# Altium PCB PCB1.PcbDoc (part 2 of 3)
Units mil, origin at the board's own origin, x right, y up, seen from the top; angles counter-clockwise.
Board outline 1614.17 x 4106.3 mil, 2 copper layers (Top Layer, Bottom Layer), stack 61.8 mil thick; 17 components, 26 nets, 94 pads, 42 vias.
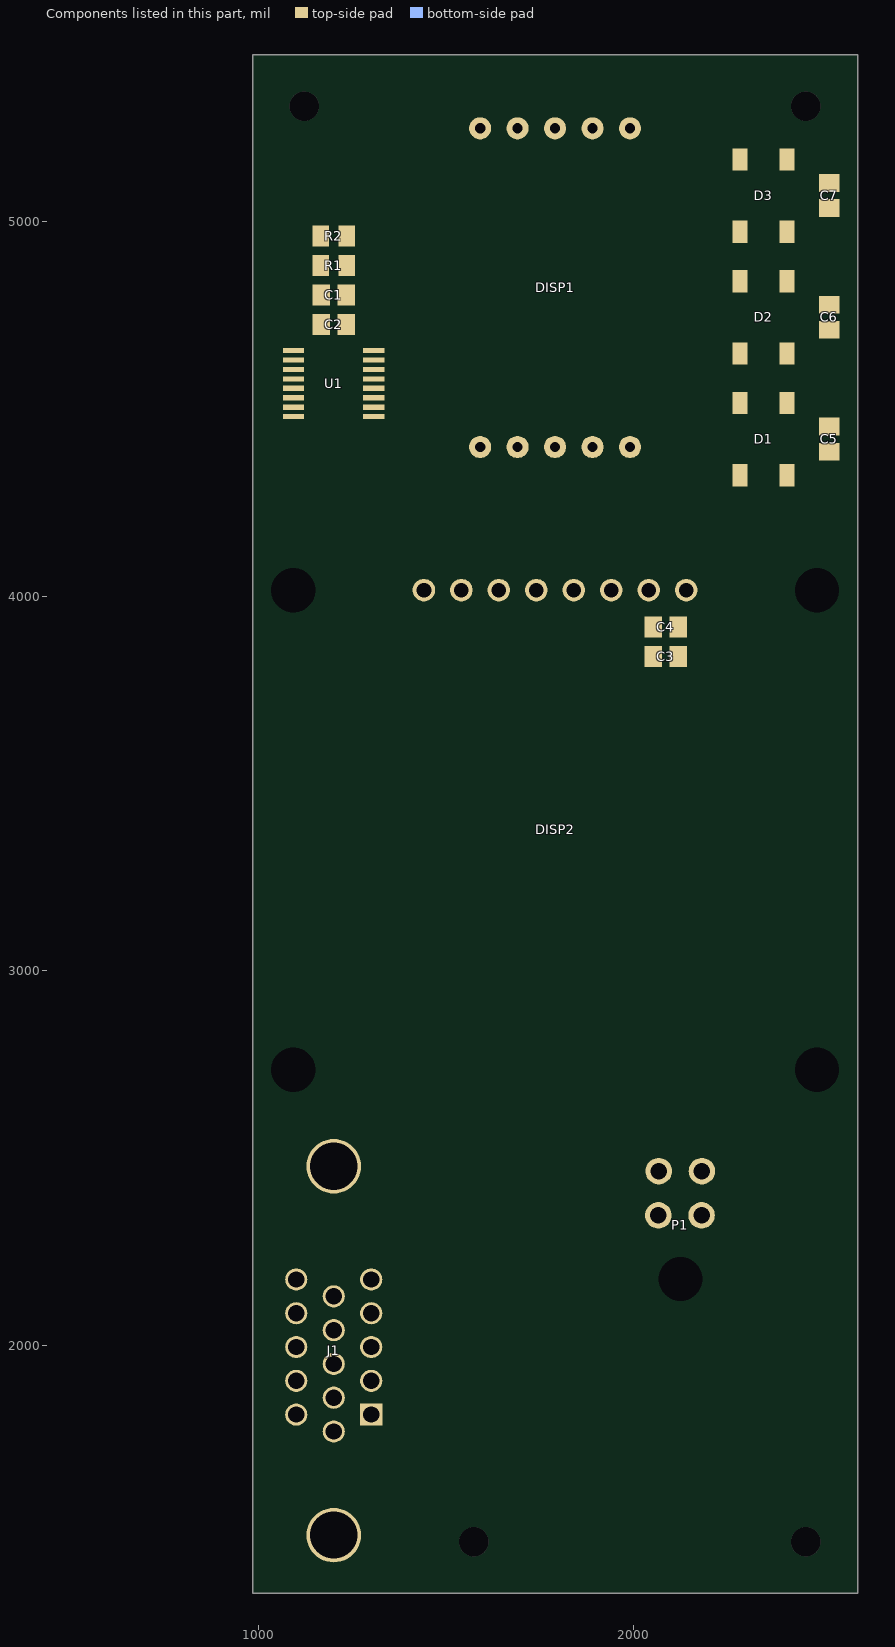
[diagram p2: the components of this part, seen from the top]

## Via types
v1: diameter 35.43/35.43 (per signal layer), hole 11.81, Top Layer to Bottom Layer, tented both sides, 42 vias

## Nets (pads, with @x,y where several pads share a name; then routed paths per layer and width w, separated by ;. In a path a pad name is that pad's centre, name@x,y a point inside that pad or via, vN(x,y) a via of type N, cw(c..) or ccw(c..) an arc to the next point about the centre after c; other vN are vias at no path point) (continued)
copper on no net: (continued)
  Bottom Layer w1: 1741.4,1568 2362.4,1568 ; 1741.4,1569 2362.4,1569 ; 1741.4,1570 2362.4,1570 ; 1741.4,1571 2362.4,1571 ; 1741.4,1572 2362.4,1572 ; 1741.4,1573 2362.4,1573 ; 1741.4,1574 2362.4,1574 ; 1741.4,1575 2362.4,1575 ; 1741.4,1576 2362.4,1576 ; 1741.4,1577 2362.4,1577 ; 1741.4,1578 2362.4,1578 ; 1741.4,1579 2362.4,1579 ; 1741.4,1580 2362.4,1580 ; 1741.4,1581 2362.4,1581 ; 1741.4,1582 2362.4,1582 ; 1741.4,1583 2362.4,1583 ; 1741.4,1584 2362.4,1584 ; 1741.4,1585 2362.4,1585 ; 1741.4,1586 2362.4,1586 ; 1741.4,1587 2362.4,1587 ; 1741.4,1588 2362.4,1588 ; 1741.4,1589 2362.4,1589 ; 1741.4,1590 2362.4,1590 ; 1741.4,1591 2362.4,1591 ; 1741.4,1592 2362.4,1592 ; 1741.4,1593 2362.4,1593 ; 1741.4,1594 2362.4,1594 ; 1741.4,1595 2362.4,1595 ; 1741.4,1596 2362.4,1596 ; 1741.4,1597 2362.4,1597 ; 1741.4,1598 2362.4,1598 ; 1741.4,1599 2362.4,1599 ; 1741.4,1600 2362.4,1600 ; 1741.4,1601 2362.4,1601 ; 1741.4,1602 2362.4,1602 ; 1741.4,1603 2362.4,1603 ; 1741.4,1604 2362.4,1604 ; 1741.4,1605 2362.4,1605 ; 1741.4,1606 1853.4,1606 ; 1741.4,1607 1852.4,1607 ; 1741.4,1608 1851.4,1608 ; 1741.4,1609 1851.4,1609 ; 1741.4,1610 1850.4,1610 ; 1741.4,1611 1850.4,1611 ; 1741.4,1612 1850.4,1612 ; 1741.4,1613 1850.4,1613 ; 1741.4,1614 1850.4,1614 ; 1741.4,1615 1850.4,1615 ; 1741.4,1616 1850.4,1616 ; 1741.4,1617 1851.4,1617 ; 1741.4,1618 1851.4,1618 ; 1741.4,1619 1852.4,1619 ; 1741.4,1620 1852.4,1620 ; 1741.4,1621 1853.4,1621 ; 1741.4,1622 1854.4,1622 ; 1741.4,1623 1864.4,1623 ; 1741.4,1624 1862.4,1624 ; 1741.4,1625 1861.4,1625 ; 1741.4,1626 1860.4,1626 ; 1741.4,1627 1859.4,1627 ; 1741.4,1628 1858.4,1628 ; 1741.4,1629 1857.4,1629 ; 1741.4,1630 1857.4,1630 ; 1741.4,1631 1856.4,1631 ; 1741.4,1632 1856.4,1632 ; 1741.4,1633 1855.4,1633 ; 1741.4,1634 1855.4,1634 ; 1741.4,1635 1855.4,1635 ; 1741.4,1636 1855.4,1636 ; 1741.4,1637 1855.4,1637 ; 1741.4,1638 1855.4,1638 ; 1741.4,1639 1855.4,1639 ; 1741.4,1640 1856.4,1640 ; 1741.4,1641 1856.4,1641 ; 1741.4,1642 1856.4,1642 ; 1741.4,1643 1856.4,1643 ; 1741.4,1644 1857.4,1644 ; 1741.4,1645 1858.4,1645 ; 1741.4,1646 1859.4,1646 ; 1741.4,1647 1862.4,1647 ; 1741.4,1648 1881.4,1648 ; 1741.4,1649 1895.4,1649 ; 1741.4,1650 1896.4,1650 ; 1741.4,1651 1896.4,1651 ; 1741.4,1652 1896.4,1652 ; 1741.4,1653 1896.4,1653 ; 1741.4,1654 1896.4,1654 ; 1741.4,1655 1897.4,1655 ; 1741.4,1656 1897.4,1656 ; 1741.4,1657 1897.4,1657 ; 1741.4,1658 1898.4,1658 ; 1741.4,1659 1898.4,1659 ; 1741.4,1660 1898.4,1660 ; 1741.4,1661 1899.4,1661 ; 1741.4,1662 1899.4,1662 ; 1741.4,1663 1900.4,1663 ; 1741.4,1664 1900.4,1664 ; 1741.4,1665 1901.4,1665 ; 1741.4,1666 1901.4,1666 ; 1741.4,1667 1835.4,1667 ; 1741.4,1668 1825.4,1668 ; 1741.4,1669 1822.4,1669 ; 1741.4,1670 1820.4,1670 ; 1741.4,1671 1818.4,1671 ; 1741.4,1672 1816.4,1672 ; 1741.4,1673 1815.4,1673 ; 1741.4,1674 1814.4,1674 ; 1741.4,1675 1813.4,1675 ; 1741.4,1676 1811.4,1676 ; 1741.4,1677 1810.4,1677 ; 1741.4,1678 1810.4,1678 ; 1741.4,1679 1809.4,1679 ; 1741.4,1680 1808.4,1680 ; 1741.4,1681 1807.4,1681 ; 1741.4,1682 1806.4,1682 ; 1741.4,1683 1805.4,1683 ; 1741.4,1684 1805.4,1684 ; 1741.4,1685 1804.4,1685 ; 1741.4,1686 1803.4,1686 ; 1741.4,1687 1803.4,1687 ; 1741.4,1688 1802.4,1688 ; 1741.4,1689 1802.4,1689 ; 1741.4,1690 1802.4,1690 ; 1741.4,1691 1801.4,1691 ; 1741.4,1692 1801.4,1692 ; 1741.4,1693 1801.4,1693 ; 1741.4,1694 1801.4,1694 ; 1741.4,1695 1801.4,1695 ; 1741.4,1696 1801.4,1696 ; 1741.4,1697 1801.4,1697 ; 1741.4,1698 1801.4,1698 ; 1741.4,1699 1801.4,1699 ; 1741.4,1700 1801.4,1700 ; 1741.4,1701 1801.4,1701 ; 1741.4,1702 1801.4,1702 ; 1741.4,1703 1801.4,1703 ; 1741.4,1704 1801.4,1704 ; 1741.4,1705 1801.4,1705 ; 1741.4,1706 1802.4,1706 ; 1741.4,1707 1802.4,1707 ; 1741.4,1708 1803.4,1708 ; 1741.4,1709 1804.4,1709 ; 1741.4,1710 1805.4,1710 ; 1741.4,1711 1806.4,1711 ; 1741.4,1712 1809.4,1712 ; 1741.4,1713 1816.4,1713 ; 1741.4,1714 1816.4,1714 ; 1741.4,1715 1816.4,1715 ; 1741.4,1716 1816.4,1716 ; 1741.4,1717 1816.4,1717 ; 1741.4,1718 1816.4,1718 ; 1741.4,1719 1816.4,1719 ; 1741.4,1720 1816.4,1720 ; 1741.4,1721 1816.4,1721 ; 1741.4,1722 1816.4,1722 ; 1741.4,1723 1816.4,1723 ; 1741.4,1724 1816.4,1724 ; 1741.4,1725 1816.4,1725 ; 1741.4,1726 1816.4,1726 ; 1741.4,1727 1817.4,1727 ; 1741.4,1728 1817.4,1728 ; 1741.4,1729 1818.4,1729 ; 1741.4,1730 1819.4,1730 ; 1741.4,1731 1821.4,1731 ; 1741.4,1732 1858.4,1732 ; 1741.4,1733 1859.4,1733 ; 1741.4,1734 1860.4,1734 ; 1741.4,1735 1861.4,1735 ; 1741.4,1736 1862.4,1736 ; 1741.4,1737 1863.4,1737 ; 1741.4,1738 1865.4,1738 ; 1741.4,1739 1866.4,1739 ; 1741.4,1740 1867.4,1740 ; 1741.4,1741 1868.4,1741 ; 1741.4,1742 1870.4,1742 ; 1741.4,1743 1871.4,1743 ; 1741.4,1744 1873.4,1744 ; 1741.4,1745 1874.4,1745 ; 1741.4,1746 1869.4,1746 ; 1741.4,1747 1869.4,1747 ; 1741.4,1748 1868.4,1748 ; 1741.4,1749 1868.4,1749 ; 1741.4,1750 1868.4,1750 ; 1741.4,1751 1868.4,1751 ; 1741.4,1752 1867.4,1752 ; 1741.4,1753 1867.4,1753 ; 1741.4,1754 1867.4,1754 ; 1741.4,1755 1867.4,1755 ; 1741.4,1756 1866.4,1756 ; 1741.4,1757 1866.4,1757 ; 1741.4,1758 1866.4,1758 ; 1741.4,1759 1865.4,1759 ; 1741.4,1760 1865.4,1760 ; 1741.4,1761 1864.4,1761 ; 1741.4,1762 1864.4,1762 ; 1741.4,1763 1863.4,1763 ; 1741.4,1764 1863.4,1764 ; 1741.4,1765 1862.4,1765 ; 1741.4,1766 1862.4,1766 ; 1741.4,1767 1861.4,1767 ; 1741.4,1768 1861.4,1768 ; 1741.4,1769 1860.4,1769 ; 1741.4,1770 1860.4,1770 ; 1741.4,1771 1859.4,1771 ; 1741.4,1772 1859.4,1772 ; 1741.4,1773 1858.4,1773 ; 1741.4,1774 1857.4,1774 ; 1741.4,1775 1856.4,1775 ; 1741.4,1776 1855.4,1776 ; 1741.4,1777 1853.4,1777 ; 1741.4,1778 1849.4,1778 ; 1741.4,1779 1846.4,1779 ; 1741.4,1780 1842.4,1780 ; 1741.4,1781 1838.4,1781 ; 1741.4,1782 1834.4,1782 ; 1741.4,1783 1830.4,1783 ; 1741.4,1784 1824.4,1784 ; 1741.4,1785 1818.4,1785 ; 1741.4,1786 1812.4,1786 ; 1741.4,1787 1777.4,1787 ; 1741.4,1788 1777.4,1788 ; 1741.4,1789 1781.4,1789 ; 1741.4,1790 1789.4,1790 ; 1741.4,1791 1900.4,1791 ; 1741.4,1792 1900.4,1792 ; 1741.4,1793 1900.4,1793 ; 1741.4,1794 1900.4,1794 ; 1741.4,1795 1900.4,1795 ; 1741.4,1796 1900.4,1796 ; 1741.4,1797 1900.4,1797 ; 1741.4,1798 1900.4,1798 ; 1741.4,1799 1901.4,1799 ; 1741.4,1800 1901.4,1800 ; 1741.4,1801 1901.4,1801 ; 1741.4,1802 1901.4,1802 ; 1741.4,1803 1901.4,1803 ; 1741.4,1804 1901.4,1804 ; 1741.4,1805 1901.4,1805 ; 1741.4,1806 1901.4,1806 ; 1741.4,1807 1901.4,1807 ; 1741.4,1808 1895.4,1808 ; 1741.4,1809 1892.4,1809 ; 1741.4,1810 1890.4,1810 ; 1741.4,1811 1887.4,1811 ; 1741.4,1812 1885.4,1812 ; 1741.4,1813 1882.4,1813 ; 1741.4,1814 1880.4,1814 ; 1741.4,1815 1878.4,1815 ; 1741.4,1816 1875.4,1816 ; 1741.4,1817 1873.4,1817 ; 1741.4,1818 1871.4,1818 ; 1741.4,1819 1869.4,1819 ; 1741.4,1820 1867.4,1820 ; 1741.4,1821 1864.4,1821 ; 1741.4,1822 1862.4,1822 ; 1741.4,1823 1860.4,1823 ; 1741.4,1824 1858.4,1824 ; 1741.4,1825 1856.4,1825 ; 1741.4,1826 1853.4,1826 ; 1741.4,1827 1851.4,1827 ; 1741.4,1828 1849.4,1828 ; 1741.4,1829 1847.4,1829 ; 1741.4,1830 1845.4,1830 ; 1741.4,1831 1843.4,1831 ; 1741.4,1832 1841.4,1832 ; 1741.4,1833 1839.4,1833 ; 1741.4,1834 1837.4,1834 ; 1741.4,1835 1835.4,1835 ; 1741.4,1836 1833.4,1836 ; 1741.4,1837 1832.4,1837 ; 1741.4,1838 1830.4,1838 ; 1741.4,1839 1828.4,1839 ; 1741.4,1840 1826.4,1840 ; 1741.4,1841 1825.4,1841 ; 1741.4,1842 1823.4,1842 ; 1741.4,1843 1821.4,1843 ; 1741.4,1844 1820.4,1844 ; 1741.4,1845 1818.4,1845 ; 1741.4,1846 1817.4,1846 ; 1741.4,1847 1815.4,1847 ; 1741.4,1848 1813.4,1848 ; 1741.4,1849 1812.4,1849 ; 1741.4,1850 1810.4,1850 ; 1741.4,1851 1809.4,1851 ; 1741.4,1852 1807.4,1852 ; 1741.4,1853 1805.4,1853 ; 1741.4,1854 1804.4,1854 ; 1741.4,1855 1802.4,1855 ; 1741.4,1856 1801.4,1856 ; 1741.4,1857 1799.4,1857 ; 1741.4,1858 1798.4,1858 ; 1741.4,1859 1796.4,1859 ; 1741.4,1860 1795.4,1860 ; 1741.4,1861 1793.4,1861 ; 1741.4,1862 1792.4,1862 ; 1741.4,1863 1790.4,1863 ; 1741.4,1864 1789.4,1864 ; 1741.4,1865 1787.4,1865 ; 1741.4,1866 1786.4,1866 ; 1741.4,1867 1784.4,1867 ; 1741.4,1868 1783.4,1868 ; 1741.4,1869 1782.4,1869 ; 1741.4,1870 1780.4,1870 ; 1741.4,1871 1779.4,1871 ; 1741.4,1872 1778.4,1872 ; 1741.4,1873 1776.4,1873 ; 1741.4,1874 1775.4,1874 ; 1741.4,1875 1774.4,1875 ; 1741.4,1876 1773.4,1876 ; 1741.4,1877 1772.4,1877 ; 1741.4,1878 1771.4,1878 ; 1741.4,1879 1769.4,1879 ; 1741.4,1880 1768.4,1880 ; 1741.4,1881 1767.4,1881 ; 1741.4,1882 1767.4,1882 ; 1741.4,1883 1767.4,1883 ; 1741.4,1884 2362.4,1884 ; 1741.4,1885 2362.4,1885 ; 1741.4,1886 2362.4,1886 ; 1741.4,1887 2362.4,1887 ; 1741.4,1888 2362.4,1888 ; 1741.4,1889 2362.4,1889 ; 1741.4,1890 2362.4,1890 ; 1741.4,1891 2362.4,1891 ; 1741.4,1892 2362.4,1892 ; 1741.4,1893 2362.4,1893 ; 1741.4,1894 2362.4,1894 ; 1741.4,1895 2362.4,1895 ; 1741.4,1896 2362.4,1896 ; 1741.4,1897 2362.4,1897 ; 1741.4,1898 2362.4,1898 ; 1741.4,1899 2362.4,1899 ; 1741.4,1900 2362.4,1900 ; 1741.4,1901 2362.4,1901 ; 1741.4,1902 2362.4,1902 ; 1741.4,1903 2362.4,1903 ; 1741.4,1904 2362.4,1904 ; 1741.4,1905 2362.4,1905 ; 1768.4,1883 2362.4,1883 ; 1770.4,1882 2362.4,1882 ; 1771.4,1881 2362.4,1881 ; 1773.4,1880 2362.4,1880 ; 1774.4,1879 2362.4,1879 ; 1776.4,1878 2362.4,1878 ; 1778.4,1877 2362.4,1877 ; 1779.4,1876 2362.4,1876 ; 1781.4,1875 2362.4,1875 ; 1782.4,1874 2362.4,1874 ; 1784.4,1873 2362.4,1873 ; 1785.4,1872 2362.4,1872 ; 1787.4,1787 1802.4,1787 ; 1787.4,1871 2362.4,1871 ; 1788.4,1870 1801.4,1870 ; 1790.4,1869 1801.4,1869 ; 1791.4,1868 1801.4,1868 ; 1793.4,1867 1803.4,1867 ; 1794.4,1866 1805.4,1866 ; 1796.4,1865 1806.4,1865 ; 1798.4,1864 1808.4,1864 ; 1799.4,1863 1809.4,1863 ; 1801.4,1862 1811.4,1862 ; 1802.4,1870 2362.4,1870 ; 1803.4,1861 1813.4,1861 ; 1804.4,1860 1814.4,1860 ; 1804.4,1869 2362.4,1869 ; 1806.4,1859 1816.4,1859 ; 1806.4,1868 2362.4,1868 ; 1808.4,1858 1818.4,1858 ; 1809.4,1857 1820.4,1857 ; 1809.4,1867 2362.4,1867 ; 1811.4,1712 1816.4,1712 ; 1811.4,1856 1822.4,1856 ; 1811.4,1866 2362.4,1866 ; 1812.4,1688 1815.4,1688 ; 1812.4,1689 1814.4,1689 ; 1812.4,1690 1814.4,1690 ; 1812.4,1691 1814.4,1691 ; 1812.4,1692 1814.4,1692 ; 1812.4,1693 1814.4,1693 ; 1812.4,1694 1814.4,1694 ; 1812.4,1695 1814.4,1695 ; 1812.4,1696 1819.4,1696 ; 1812.4,1697 1819.4,1697 ; 1813.4,1686 1815.4,1686 ; 1813.4,1687 1815.4,1687 ; 1813.4,1790 1900.4,1790 ; 1813.4,1855 1824.4,1855 ; 1813.4,1865 2362.4,1865 ; 1814.4,1684 1816.4,1684 ; 1814.4,1685 1816.4,1685 ; 1814.4,1708 1816.4,1708 ; 1814.4,1709 1816.4,1709 ; 1814.4,1710 1816.4,1710 ; 1814.4,1711 1816.4,1711 ; 1814.4,1854 1826.4,1854 ; 1815.4,1682 1818.4,1682 ; 1815.4,1683 1817.4,1683 ; 1815.4,1695 1820.4,1695 ; 1815.4,1703 1817.4,1703 ; 1815.4,1704 1817.4,1704 ; 1815.4,1705 1817.4,1705 ; 1815.4,1706 1817.4,1706 ; 1815.4,1707 1816.4,1707 ; 1815.4,1864 2362.4,1864 ; 1816.4,1681 1818.4,1681 ; 1816.4,1698 1818.4,1698 ; 1816.4,1699 1818.4,1699 ; 1816.4,1700 1818.4,1700 ; 1816.4,1701 1817.4,1701 ; 1816.4,1702 1817.4,1702 ; 1816.4,1853 1828.4,1853 ; 1817.4,1680 1819.4,1680 ; 1817.4,1694 1820.4,1694 ; 1817.4,1863 2362.4,1863 ; 1818.4,1678 1821.4,1678 ; 1818.4,1679 1820.4,1679 ; 1818.4,1693 1821.4,1693 ; 1818.4,1852 1829.4,1852 ; 1819.4,1677 1821.4,1677 ; 1819.4,1692 1821.4,1692 ; 1819.4,1851 1831.4,1851 ; 1819.4,1862 2362.4,1862 ; 1820.4,1676 1822.4,1676 ; 1820.4,1690 1823.4,1690 ; 1820.4,1691 1822.4,1691 ; 1821.4,1675 1823.4,1675 ; 1821.4,1689 1823.4,1689 ; 1821.4,1789 1848.4,1789 ; 1821.4,1850 1833.4,1850 ; 1821.4,1861 2362.4,1861 ; 1822.4,1674 1824.4,1674 ; 1822.4,1688 1824.4,1688 ; 1823.4,1672 1826.4,1672 ; 1823.4,1673 1825.4,1673 ; 1823.4,1686 1826.4,1686 ; 1823.4,1687 1825.4,1687 ; 1823.4,1849 1835.4,1849 ; 1823.4,1860 2362.4,1860 ; 1824.4,1671 1828.4,1671 ; 1824.4,1685 1831.4,1685 ; 1824.4,1848 1837.4,1848 ; 1825.4,1670 1829.4,1670 ; 1825.4,1684 1831.4,1684 ; 1825.4,1859 2362.4,1859 ; 1826.4,1668 1832.4,1668 ; 1826.4,1669 1831.4,1669 ; 1826.4,1683 1831.4,1683 ; 1826.4,1698 1828.4,1698 ; 1826.4,1699 1828.4,1699 ; 1826.4,1700 1828.4,1700 ; 1826.4,1701 1828.4,1701 ; 1826.4,1702 1828.4,1702 ; 1826.4,1703 1828.4,1703 ; 1826.4,1704 1827.4,1704 ; 1826.4,1705 1827.4,1705 ; 1826.4,1706 1827.4,1706 ; 1826.4,1707 1827.4,1707 ; 1826.4,1708 1828.4,1708 ; 1826.4,1709 1828.4,1709 ; 1826.4,1710 1829.4,1710 ; 1826.4,1847 1839.4,1847 ; 1827.4,1682 1831.4,1682 ; 1827.4,1692 1829.4,1692 ; 1827.4,1693 1829.4,1693 ; 1827.4,1694 1829.4,1694 ; 1827.4,1695 1828.4,1695 ; 1827.4,1696 1828.4,1696 ; 1827.4,1697 1828.4,1697 ; 1827.4,1711 1829.4,1711 ; 1827.4,1731 1838.4,1731 ; 1827.4,1858 2362.4,1858 ; 1828.4,1686 1830.4,1686 ; 1828.4,1687 1830.4,1687 ; 1828.4,1688 1830.4,1688 ; 1828.4,1689 1830.4,1689 ; 1828.4,1690 1830.4,1690 ; 1828.4,1691 1829.4,1691 ; 1828.4,1788 1848.4,1788 ; 1828.4,1846 1841.4,1846 ; 1829.4,1681 1832.4,1681 ; 1829.4,1730 1836.4,1730 ; 1829.4,1845 1843.4,1845 ; 1829.4,1857 2362.4,1857 ; 1830.4,1729 1835.4,1729 ; 1831.4,1680 1832.4,1680 ; 1831.4,1728 1835.4,1728 ; 1831.4,1844 1846.4,1844 ; 1831.4,1856 2362.4,1856 ; 1832.4,1724 1835.4,1724 ; 1832.4,1725 1835.4,1725 ; 1832.4,1726 1835.4,1726 ; 1832.4,1727 1835.4,1727 ; 1833.4,1714 1835.4,1714 ; 1833.4,1715 1835.4,1715 ; 1833.4,1716 1835.4,1716 ; 1833.4,1717 1835.4,1717 ; 1833.4,1718 1835.4,1718 ; 1833.4,1719 1835.4,1719 ; 1833.4,1720 1835.4,1720 ; 1833.4,1721 1835.4,1721 ; 1833.4,1722 1835.4,1722 ; 1833.4,1723 1835.4,1723 ; 1833.4,1787 1848.4,1787 ; 1833.4,1843 1848.4,1843 ; 1833.4,1855 2362.4,1855 ; 1834.4,1708 1836.4,1708 ; 1834.4,1709 1836.4,1709 ; 1834.4,1710 1836.4,1710 ; 1834.4,1711 1836.4,1711 ; 1834.4,1712 1836.4,1712 ; 1834.4,1713 1836.4,1713 ; 1835.4,1703 1837.4,1703 ; 1835.4,1704 1837.4,1704 ; 1835.4,1705 1837.4,1705 ; 1835.4,1706 1837.4,1706 ; 1835.4,1707 1836.4,1707 ; 1835.4,1842 1850.4,1842 ; 1835.4,1854 2362.4,1854 ; 1836.4,1698 1838.4,1698 ; 1836.4,1699 1838.4,1699 ; 1836.4,1700 1838.4,1700 ; 1836.4,1701 1838.4,1701 ; 1836.4,1702 1837.4,1702 ; 1837.4,1695 1839.4,1695 ; 1837.4,1696 1839.4,1696 ; 1837.4,1697 1839.4,1697 ; 1837.4,1786 1848.4,1786 ; 1837.4,1841 1852.4,1841 ; 1838.4,1692 1840.4,1692 ; 1838.4,1693 1840.4,1693 ; 1838.4,1694 1840.4,1694 ; 1838.4,1853 2362.4,1853 ; 1839.4,1690 1841.4,1690 ; 1839.4,1691 1841.4,1691 ; 1839.4,1840 1854.4,1840 ; 1840.4,1688 1842.4,1688 ; 1840.4,1689 1842.4,1689 ; 1840.4,1785 1849.4,1785 ; 1840.4,1852 2362.4,1852 ; 1841.4,1686 1847.4,1686 ; 1841.4,1687 1843.4,1687 ; 1841.4,1839 1857.4,1839 ; 1842.4,1685 1848.4,1685 ; 1842.4,1851 2362.4,1851 ; 1843.4,1684 1848.4,1684 ; 1843.4,1838 1859.4,1838 ; 1844.4,1667 1901.4,1667 ; 1844.4,1683 1849.4,1683 ; 1844.4,1692 1846.4,1692 ; 1844.4,1693 1846.4,1693 ; 1844.4,1694 1846.4,1694 ; 1844.4,1695 1846.4,1695 ; 1844.4,1696 1846.4,1696 ; 1844.4,1697 1846.4,1697 ; 1844.4,1698 1846.4,1698 ; 1844.4,1699 1846.4,1699 ; 1844.4,1700 1846.4,1700 ; 1844.4,1701 1846.4,1701 ; 1844.4,1702 1847.4,1702 ; 1844.4,1784 1850.4,1784 ; 1844.4,1850 2362.4,1850 ; 1845.4,1682 1904.4,1682 ; 1845.4,1687 1847.4,1687 ; 1845.4,1688 1847.4,1688 ; 1845.4,1689 1847.4,1689 ; 1845.4,1690 1846.4,1690 ; 1845.4,1691 1846.4,1691 ; 1845.4,1703 1847.4,1703 ; 1845.4,1704 1847.4,1704 ; 1845.4,1837 1861.4,1837 ; 1846.4,1668 1902.4,1668 ; 1846.4,1681 1904.4,1681 ; 1846.4,1705 1848.4,1705 ; 1846.4,1706 1848.4,1706 ; 1846.4,1711 1849.4,1711 ; 1846.4,1712 1849.4,1712 ; 1846.4,1713 1848.4,1713 ; 1846.4,1731 1857.4,1731 ; 1847.4,1669 1902.4,1669 ; 1847.4,1680 1904.4,1680 ; 1847.4,1707 1848.4,1707 ; 1847.4,1708 1849.4,1708 ; 1847.4,1709 1849.4,1709 ; 1847.4,1710 1849.4,1710 ; 1847.4,1730 1855.4,1730 ; 1847.4,1836 1864.4,1836 ; 1847.4,1849 2362.4,1849 ; 1848.4,1670 1902.4,1670 ; 1848.4,1679 1904.4,1679 ; 1848.4,1728 1851.4,1728 ; 1848.4,1729 1854.4,1729 ; 1848.4,1783 1851.4,1783 ; 1849.4,1671 1903.4,1671 ; 1849.4,1672 1903.4,1672 ; 1849.4,1673 1903.4,1673 ; 1849.4,1678 1904.4,1678 ; 1849.4,1835 1866.4,1835 ; 1849.4,1848 2362.4,1848 ; 1850.4,1674 1903.4,1674 ; 1850.4,1675 1904.4,1675 ; 1850.4,1676 1904.4,1676 ; 1850.4,1677 1904.4,1677 ; 1850.4,1683 1904.4,1683 ; 1850.4,1684 1903.4,1684 ; 1850.4,1685 1903.4,1685 ; 1850.4,1686 1902.4,1686 ; 1851.4,1687 1901.4,1687 ; 1851.4,1688 1898.4,1688 ; 1851.4,1689 1894.4,1689 ; 1851.4,1690 1890.4,1690 ; 1851.4,1691 1888.4,1691 ; 1851.4,1834 1869.4,1834 ; 1851.4,1847 2362.4,1847 ; 1852.4,1692 1887.4,1692 ; 1852.4,1693 1887.4,1693 ; 1852.4,1694 1886.4,1694 ; 1852.4,1789 1900.4,1789 ; 1853.4,1695 1886.4,1695 ; 1853.4,1788 1900.4,1788 ; 1853.4,1833 1871.4,1833 ; 1853.4,1846 2134.4,1846 ; 1854.4,1696 1886.4,1696 ; 1854.4,1787 1900.4,1787 ; 1855.4,1615 1864.4,1615 ; 1855.4,1616 1866.4,1616 ; 1855.4,1697 1885.4,1697 ; 1855.4,1786 1900.4,1786 ; 1855.4,1832 1874.4,1832 ; 1856.4,1613 1861.4,1613 ; 1856.4,1614 1863.4,1614 ; 1856.4,1617 1867.4,1617 ; 1856.4,1618 1869.4,1618 ; 1856.4,1619 1870.4,1619 ; 1856.4,1620 1871.4,1620 ; 1856.4,1621 1869.4,1621 ; 1856.4,1622 1866.4,1622 ; 1856.4,1784 1901.4,1784 ; 1856.4,1785 1901.4,1785 ; 1856.4,1845 2123.4,1845 ; 1857.4,1612 1859.4,1612 ; 1857.4,1783 1900.4,1783 ; 1857.4,1831 1877.4,1831 ; 1858.4,1698 1885.4,1698 ; 1858.4,1781 1899.4,1781 ; 1858.4,1782 1900.4,1782 ; 1858.4,1844 2114.4,1844 ; 1859.4,1699 1885.4,1699 ; 1859.4,1780 1899.4,1780 ; 1860.4,1700 1885.4,1700 ; 1860.4,1778 1898.4,1778 ; 1860.4,1779 1899.4,1779 ; 1860.4,1830 1880.4,1830 ; 1861.4,1637 1874.4,1637 ; 1861.4,1638 1874.4,1638 ; 1861.4,1639 1874.4,1639 ; 1861.4,1640 1874.4,1640 ; 1861.4,1701 1884.4,1701 ; 1861.4,1702 1884.4,1702 ; 1861.4,1777 1898.4,1777 ; 1861.4,1843 2106.4,1843 ; 1862.4,1606 2362.4,1606 ; 1862.4,1635 1875.4,1635 ; 1862.4,1636 1875.4,1636 ; 1862.4,1641 1874.4,1641 ; 1862.4,1642 1875.4,1642 ; 1862.4,1703 1884.4,1703 ; 1862.4,1775 1897.4,1775 ; 1862.4,1776 1898.4,1776 ; 1862.4,1829 1883.4,1829 ; 1863.4,1633 1876.4,1633 ; 1863.4,1634 1875.4,1634 ; 1863.4,1643 1875.4,1643 ; 1863.4,1644 1875.4,1644 ; 1863.4,1773 1897.4,1773 ; 1863.4,1774 1897.4,1774 ; 1863.4,1842 2098.4,1842 ; 1864.4,1645 1876.4,1645 ; 1864.4,1704 1884.4,1704 ; 1864.4,1771 1897.4,1771 ; 1864.4,1772 1897.4,1772 ; 1864.4,1828 1887.4,1828 ; 1865.4,1607 2362.4,1607 ; 1865.4,1646 1877.4,1646 ; 1865.4,1647 1879.4,1647 ; 1865.4,1769 1897.4,1769 ; 1865.4,1770 1897.4,1770 ; 1866.4,1768 1894.4,1768 ; 1866.4,1841 2090.4,1841 ; 1867.4,1766 1891.4,1766 ; 1867.4,1767 1892.4,1767 ; 1867.4,1827 1890.4,1827 ; 1868.4,1608 2362.4,1608 ; 1868.4,1705 1884.4,1705 ; 1868.4,1764 1889.4,1764 ; 1868.4,1765 1890.4,1765 ; 1869.4,1761 1887.4,1761 ; 1869.4,1762 1888.4,1762 ; 1869.4,1763 1889.4,1763 ; 1869.4,1826 1894.4,1826 ; 1869.4,1840 2082.4,1840 ; 1870.4,1609 2362.4,1609 ; 1870.4,1759 1886.4,1759 ; 1870.4,1760 1887.4,1760 ; 1871.4,1706 1884.4,1706 ; 1871.4,1757 1885.4,1757 ; 1871.4,1758 1886.4,1758 ; 1871.4,1825 1898.4,1825 ; 1872.4,1610 2362.4,1610 ; 1872.4,1754 1884.4,1754 ; 1872.4,1755 1884.4,1755 ; 1872.4,1756 1885.4,1756 ; 1872.4,1839 2076.4,1839 ; 1873.4,1611 2068.4,1611 ; 1873.4,1746 1876.4,1746 ; 1873.4,1751 1882.4,1751 ; 1873.4,1752 1883.4,1752 ; 1873.4,1753 1883.4,1753 ; 1874.4,1707 1883.4,1707 ; 1874.4,1747 1877.4,1747 ; 1874.4,1748 1879.4,1748 ; 1874.4,1749 1880.4,1749 ; 1874.4,1750 1881.4,1750 ; 1874.4,1824 1896.4,1824 ; 1875.4,1612 2065.4,1612 ; 1875.4,1708 1883.4,1708 ; 1875.4,1838 2070.4,1838 ; 1876.4,1613 2063.4,1613 ; 1877.4,1614 2062.4,1614 ; 1877.4,1709 1883.4,1709 ; 1877.4,1823 1895.4,1823 ; 1878.4,1710 1883.4,1710 ; 1878.4,1837 2064.4,1837 ; 1879.4,1615 2061.4,1615 ; 1879.4,1711 1883.4,1711 ; 1879.4,1822 1895.4,1822 ; 1880.4,1616 2060.4,1616 ; 1880.4,1640 1892.4,1640 ; 1880.4,1641 1893.4,1641 ; 1880.4,1642 1893.4,1642 ; 1880.4,1712 1883.4,1712 ; 1881.4,1638 1890.4,1638 ; 1881.4,1639 1891.4,1639 ; 1881.4,1643 1894.4,1643 ; 1881.4,1644 1894.4,1644 ; 1881.4,1836 2058.4,1836 ; 1882.4,1617 2059.4,1617 ; 1882.4,1637 1889.4,1637 ; 1882.4,1645 1894.4,1645 ; 1882.4,1646 1895.4,1646 ; 1882.4,1713 1897.4,1713 ; 1882.4,1821 1895.4,1821 ; 1883.4,1636 1888.4,1636 ; 1883.4,1647 1895.4,1647 ; 1883.4,1648 1895.4,1648 ; 1883.4,1714 1900.4,1714 ; 1884.4,1618 2058.4,1618 ; 1884.4,1635 1887.4,1635 ; 1885.4,1820 1895.4,1820 ; 1885.4,1835 2053.4,1835 ; 1886.4,1619 2058.4,1619 ; 1888.4,1819 1898.4,1819 ; 1889.4,1620 2058.4,1620 ; 1889.4,1834 2048.4,1834 ; 1891.4,1818 1910.4,1818 ; 1892.4,1621 2057.4,1621 ; 1892.4,1833 2043.4,1833 ; 1895.4,1622 2057.4,1622 ; 1895.4,1715 1903.4,1715 ; 1895.4,1765 1897.4,1765 ; 1895.4,1766 1897.4,1766 ; 1895.4,1767 1897.4,1767 ; 1895.4,1768 1897.4,1768 ; 1895.4,1817 1910.4,1817 ; 1896.4,1761 1898.4,1761 ; 1896.4,1762 1898.4,1762 ; 1896.4,1763 1897.4,1763 ; 1896.4,1764 1897.4,1764 ; 1896.4,1832 2038.4,1832 ; 1897.4,1758 1899.4,1758 ; 1897.4,1759 1899.4,1759 ; 1897.4,1760 1898.4,1760 ; 1897.4,1815 1898.4,1815 ; 1897.4,1816 1898.4,1816 ; 1897.4,1820 1898.4,1820 ; 1898.4,1623 2057.4,1623 ; 1898.4,1756 1900.4,1756 ; 1898.4,1757 1899.4,1757 ; 1898.4,1812 1899.4,1812 ; 1898.4,1813 1899.4,1813 ; 1898.4,1814 1899.4,1814 ; 1898.4,1826 1900.4,1826 ; 1899.4,1754 1901.4,1754 ; 1899.4,1755 1900.4,1755 ; 1899.4,1808 1901.4,1808 ; 1899.4,1809 1901.4,1809 ; 1899.4,1810 1900.4,1810 ; 1899.4,1811 1900.4,1811 ; 1900.4,1624 2057.4,1624 ; 1900.4,1716 1905.4,1716 ; 1900.4,1752 1902.4,1752 ; 1900.4,1753 1901.4,1753 ; 1900.4,1816 1911.4,1816 ; 1900.4,1819 1909.4,1819 ; 1900.4,1827 1902.4,1827 ; 1900.4,1831 2033.4,1831 ; 1901.4,1625 2057.4,1625 ; 1901.4,1750 1903.4,1750 ; 1901.4,1751 1902.4,1751 ; 1901.4,1766 1916.4,1766 ; 1901.4,1767 1921.4,1767 ; 1901.4,1768 1921.4,1768 ; 1901.4,1769 1921.4,1769 ; 1901.4,1770 1921.4,1770 ; 1901.4,1771 1921.4,1771 ; 1901.4,1820 1908.4,1820 ; 1902.4,1626 2057.4,1626 ; 1902.4,1627 2057.4,1627 ; 1902.4,1747 1905.4,1747 ; 1902.4,1748 1904.4,1748 ; 1902.4,1749 1904.4,1749 ; 1902.4,1763 1917.4,1763 ; 1902.4,1764 1916.4,1764 ; 1902.4,1765 1916.4,1765 ; 1902.4,1772 1904.4,1772 ; 1902.4,1773 1903.4,1773 ; 1902.4,1774 1903.4,1774 ; 1902.4,1775 1903.4,1775 ; 1903.4,1628 2057.4,1628 ; 1903.4,1717 1907.4,1717 ; 1903.4,1745 1906.4,1745 ; 1903.4,1746 1905.4,1746 ; 1903.4,1760 1914.4,1760 ; 1903.4,1761 1914.4,1761 ; 1903.4,1762 1918.4,1762 ; 1903.4,1814 1912.4,1814 ; 1903.4,1815 1912.4,1815 ; 1903.4,1821 1908.4,1821 ; 1903.4,1830 2029.4,1830 ; 1904.4,1629 2021.4,1629 ; 1904.4,1630 2020.4,1630 ; 1904.4,1744 1906.4,1744 ; 1904.4,1758 1915.4,1758 ; 1904.4,1759 1914.4,1759 ; 1904.4,1812 1913.4,1812 ; 1904.4,1813 1913.4,1813 ; 1904.4,1822 1906.4,1822 ; 1904.4,1828 2020.4,1828 ; 1904.4,1829 2024.4,1829 ; 1905.4,1631 2019.4,1631 ; 1905.4,1718 1908.4,1718 ; 1905.4,1742 1908.4,1742 ; 1905.4,1743 1907.4,1743 ; 1905.4,1755 1918.4,1755 ; 1905.4,1756 1917.4,1756 ; 1905.4,1757 1916.4,1757 ; 1905.4,1792 1919.4,1792 ; 1905.4,1793 1919.4,1793 ; 1905.4,1794 1919.4,1794 ; 1905.4,1795 1919.4,1795 ; 1905.4,1796 1919.4,1796 ; 1905.4,1797 1919.4,1797 ; 1905.4,1798 1918.4,1798 ; 1905.4,1799 1918.4,1799 ; 1905.4,1800 1918.4,1800 ; 1905.4,1810 1914.4,1810 ; 1905.4,1811 1914.4,1811 ; 1906.4,1632 2018.4,1632 ; 1906.4,1633 2018.4,1633 ; 1906.4,1719 1909.4,1719 ; 1906.4,1740 1909.4,1740 ; 1906.4,1741 1908.4,1741 ; 1906.4,1753 1921.4,1753 ; 1906.4,1754 1919.4,1754 ; 1906.4,1782 1920.4,1782 ; 1906.4,1783 1920.4,1783 ; 1906.4,1784 1919.4,1784 ; 1906.4,1785 1919.4,1785 ; 1906.4,1786 1919.4,1786 ; 1906.4,1787 1919.4,1787 ; 1906.4,1788 1919.4,1788 ; 1906.4,1789 1919.4,1789 ; 1906.4,1790 1919.4,1790 ; 1906.4,1791 1919.4,1791 ; 1906.4,1801 1917.4,1801 ; 1906.4,1802 1917.4,1802 ; 1906.4,1803 1917.4,1803 ; 1906.4,1804 1916.4,1804 ; 1906.4,1805 1916.4,1805 ; 1906.4,1806 1916.4,1806 ; 1906.4,1807 1915.4,1807 ; 1906.4,1808 1915.4,1808 ; 1906.4,1809 1914.4,1809 ; 1907.4,1634 2017.4,1634 ; 1907.4,1635 2016.4,1635 ; 1907.4,1738 1910.4,1738 ; 1907.4,1739 1909.4,1739 ; 1907.4,1752 1922.4,1752 ; 1907.4,1772 1920.4,1772 ; 1907.4,1773 1920.4,1773 ; 1907.4,1774 1920.4,1774 ; 1907.4,1775 1920.4,1775 ; 1907.4,1776 1920.4,1776 ; 1907.4,1777 1920.4,1777 ; 1907.4,1778 1920.4,1778 ; 1907.4,1779 1920.4,1779 ; 1907.4,1780 1920.4,1780 ; 1907.4,1781 1920.4,1781 ; 1908.4,1636 2016.4,1636 ; 1908.4,1637 2015.4,1637 ; 1908.4,1720 1910.4,1720 ; 1908.4,1721 1914.4,1721 ; 1908.4,1727 1910.4,1727 ; 1908.4,1728 1910.4,1728 ; 1908.4,1729 1910.4,1729 ; 1908.4,1730 1911.4,1730 ; 1908.4,1731 1911.4,1731 ; 1908.4,1736 1911.4,1736 ; 1908.4,1737 1910.4,1737 ; 1908.4,1750 1925.4,1750 ; 1908.4,1751 1924.4,1751 ; 1908.4,1827 2016.4,1827 ; 1909.4,1638 2015.4,1638 ; 1909.4,1722 1913.4,1722 ; 1909.4,1723 1912.4,1723 ; 1909.4,1724 1912.4,1724 ; 1909.4,1725 1932.4,1725 ; 1909.4,1726 1941.4,1726 ; 1909.4,1732 1911.4,1732 ; 1909.4,1733 1911.4,1733 ; 1909.4,1734 1911.4,1734 ; 1909.4,1735 1911.4,1735 ; 1909.4,1748 1928.4,1748 ; 1909.4,1749 1927.4,1749 ; 1909.4,1826 2012.4,1826 ; 1910.4,1639 2014.4,1639 ; 1910.4,1640 2014.4,1640 ; 1910.4,1747 1930.4,1747 ; 1911.4,1641 2013.4,1641 ; 1911.4,1720 1914.4,1720 ; 1911.4,1745 1933.4,1745 ; 1911.4,1746 1932.4,1746 ; 1911.4,1824 2004.4,1824 ; 1911.4,1825 2008.4,1825 ; 1912.4,1642 2013.4,1642 ; 1912.4,1744 1935.4,1744 ; 1912.4,1823 2000.4,1823 ; 1913.4,1643 2012.4,1643 ; 1913.4,1718 1915.4,1718 ; 1913.4,1719 1915.4,1719 ; 1913.4,1742 1937.4,1742 ; 1913.4,1743 1936.4,1743 ; 1913.4,1822 1996.4,1822 ; 1914.4,1644 2006.4,1644 ; 1914.4,1645 2006.4,1645 ; 1914.4,1717 1916.4,1717 ; 1914.4,1727 1951.4,1727 ; 1914.4,1740 1939.4,1740 ; 1914.4,1741 1938.4,1741 ; 1914.4,1820 1990.4,1820 ; 1914.4,1821 1993.4,1821 ; 1915.4,1646 2006.4,1646 ; 1915.4,1715 1917.4,1715 ; 1915.4,1716 1917.4,1716 ; 1915.4,1728 1948.4,1728 ; 1915.4,1738 1940.4,1738 ; 1915.4,1739 1939.4,1739 ; 1915.4,1819 1986.4,1819 ; 1916.4,1647 2006.4,1647 ; 1916.4,1714 1918.4,1714 ; 1916.4,1729 1946.4,1729 ; 1916.4,1730 1945.4,1730 ; 1916.4,1731 1944.4,1731 ; 1916.4,1732 1943.4,1732 ; 1916.4,1733 1943.4,1733 ; 1916.4,1734 1942.4,1734 ; 1916.4,1735 1942.4,1735 ; 1916.4,1736 1941.4,1736 ; 1916.4,1737 1941.4,1737 ; 1916.4,1817 1981.4,1817 ; 1916.4,1818 1983.4,1818 ; 1917.4,1648 2005.4,1648 ; 1917.4,1712 1919.4,1712 ; 1917.4,1713 1919.4,1713 ; 1917.4,1761 1919.4,1761 ; 1917.4,1816 1978.4,1816 ; 1918.4,1649 2005.4,1649 ; 1918.4,1710 1920.4,1710 ; 1918.4,1711 1920.4,1711 ; 1918.4,1814 1974.4,1814 ; 1918.4,1815 1976.4,1815 ; 1919.4,1650 2005.4,1650 ; 1919.4,1708 1921.4,1708 ; 1919.4,1709 1921.4,1709 ; 1919.4,1760 1920.4,1760 ; 1919.4,1766 1921.4,1766 ; 1919.4,1812 1970.4,1812 ; 1919.4,1813 1972.4,1813 ; 1920.4,1651 2004.4,1651 ; 1920.4,1706 1922.4,1706 ; 1920.4,1707 1922.4,1707 ; 1920.4,1759 1922.4,1759 ; 1920.4,1810 1969.4,1810 ; 1920.4,1811 1969.4,1811 ; 1921.4,1652 2004.4,1652 ; 1921.4,1704 1923.4,1704 ; 1921.4,1705 1923.4,1705 ; 1921.4,1758 1923.4,1758 ; 1921.4,1765 1922.4,1765 ; 1921.4,1808 1964.4,1808 ; 1921.4,1809 1971.4,1809 ; 1922.4,1653 2003.4,1653 ; 1922.4,1701 1925.4,1701 ; 1922.4,1702 1924.4,1702 ; 1922.4,1703 1924.4,1703 ; 1922.4,1805 1962.4,1805 ; 1922.4,1806 1962.4,1806 ; 1922.4,1807 1963.4,1807 ; 1923.4,1654 2002.4,1654 ; 1923.4,1699 1925.4,1699 ; 1923.4,1700 1925.4,1700 ; 1923.4,1757 1925.4,1757 ; 1923.4,1802 1958.4,1802 ; 1923.4,1803 1959.4,1803 ; 1923.4,1804 1962.4,1804 ; 1924.4,1655 2002.4,1655 ; 1924.4,1697 1926.4,1697 ; 1924.4,1698 1926.4,1698 ; 1924.4,1756 1926.4,1756 ; 1925.4,1656 2001.4,1656 ; 1925.4,1675 1926.4,1675 ; 1925.4,1694 1927.4,1694 ; 1925.4,1695 1927.4,1695 ; 1925.4,1696 1927.4,1696 ; 1926.4,1657 2000.4,1657 ; 1926.4,1676 1927.4,1676 ; 1926.4,1677 1929.4,1677 ; 1926.4,1678 1930.4,1678 ; 1926.4,1679 1932.4,1679 ; 1926.4,1680 1933.4,1680 ; 1926.4,1690 1928.4,1690 ; 1926.4,1691 1928.4,1691 ; 1926.4,1692 1928.4,1692 ; 1926.4,1693 1928.4,1693 ; 1926.4,1755 1927.4,1755 ; 1926.4,1801 1956.4,1801 ; 1927.4,1658 1999.4,1658 ; 1927.4,1659 1999.4,1659 ; 1927.4,1681 1935.4,1681 ; 1927.4,1682 1929.4,1682 ; 1927.4,1683 1929.4,1683 ; 1927.4,1684 1929.4,1684 ; 1927.4,1685 1929.4,1685 ; 1927.4,1686 1928.4,1686 ; 1927.4,1687 1928.4,1687 ; 1927.4,1688 1928.4,1688 ; 1927.4,1689 1928.4,1689 ; 1927.4,1754 1929.4,1754 ; 1928.4,1660 1998.4,1660 ; 1928.4,1661 1997.4,1661 ; 1928.4,1753 1930.4,1753 ; 1928.4,1800 1955.4,1800 ; 1929.4,1662 1996.4,1662 ; 1930.4,1663 1995.4,1663 ; 1930.4,1752 1931.4,1752 ; 1930.4,1799 1954.4,1799 ; 1931.4,1664 1993.4,1664 ; 1931.4,1798 1953.4,1798 ; 1932.4,1665 1992.4,1665 ; 1933.4,1666 1991.4,1666 ; 1933.4,1682 1937.4,1682 ; 1933.4,1797 1952.4,1797 ; 1934.4,1796 1950.4,1796 ; 1935.4,1667 1990.4,1667 ; 1935.4,1683 1940.4,1683 ; 1936.4,1795 1949.4,1795 ; 1937.4,1668 1956.4,1668 ; 1937.4,1684 1943.4,1684 ; 1937.4,1794 1947.4,1794 ; 1938.4,1793 1942.4,1793 ; 1940.4,1669 1955.4,1669 ; 1940.4,1685 1946.4,1685 ; 1940.4,1792 1942.4,1792 ; 1941.4,1791 1943.4,1791 ; 1942.4,1790 1944.4,1790 ; 1943.4,1670 1953.4,1670 ; 1943.4,1686 1950.4,1686 ; 1943.4,1789 1945.4,1789 ; 1944.4,1674 1948.4,1674 ; 1944.4,1675 1947.4,1675 ; 1944.4,1676 1947.4,1676 ; 1944.4,1726 1954.4,1726 ; 1944.4,1788 1946.4,1788 ; 1945.4,1671 1952.4,1671 ; 1945.4,1677 1947.4,1677 ; 1945.4,1678 1948.4,1678 ; 1945.4,1787 1962.4,1787 ; 1946.4,1673 1950.4,1673 ; 1946.4,1679 1949.4,1679 ; 1946.4,1687 1960.4,1687 ; 1946.4,1786 1962.4,1786 ; 1947.4,1672 1951.4,1672 ; 1947.4,1680 1950.4,1680 ; 1947.4,1785 1962.4,1785 ; 1948.4,1681 1951.4,1681 ; 1948.4,1725 1956.4,1725 ; 1948.4,1783 1962.4,1783 ; 1948.4,1784 1962.4,1784 ; 1948.4,1788 1962.4,1788 ; 1949.4,1682 1952.4,1682 ; 1949.4,1688 1961.4,1688 ; 1949.4,1782 1962.4,1782 ; 1950.4,1781 1962.4,1781 ; 1950.4,1789 1961.4,1789 ; 1951.4,1683 1953.4,1683 ; 1951.4,1724 1959.4,1724 ; 1951.4,1779 1962.4,1779 ; 1951.4,1780 1962.4,1780 ; 1951.4,1790 1961.4,1790 ; 1952.4,1684 1955.4,1684 ; 1952.4,1778 1962.4,1778 ; 1953.4,1685 1956.4,1685 ; 1953.4,1686 1958.4,1686 ; 1953.4,1689 1963.4,1689 ; 1953.4,1777 1961.4,1777 ; 1953.4,1791 1961.4,1791 ; 1954.4,1776 1961.4,1776 ; 1954.4,1792 1961.4,1792 ; 1955.4,1723 1961.4,1723 ; 1955.4,1774 1960.4,1774 ; 1955.4,1775 1961.4,1775 ; 1956.4,1690 1965.4,1690 ; 1956.4,1773 1960.4,1773 ; 1956.4,1793 1961.4,1793 ; 1957.4,1772 1960.4,1772 ; 1958.4,1722 1963.4,1722 ; 1958.4,1770 1959.4,1770 ; 1958.4,1771 1960.4,1771 ; 1958.4,1794 1961.4,1794 ; 1959.4,1668 1988.4,1668 ; 1959.4,1795 1961.4,1795 ; 1960.4,1691 1967.4,1691 ; 1960.4,1796 1961.4,1796 ; 1960.4,1797 1961.4,1797 ; 1960.4,1798 1961.4,1798 ; 1960.4,1799 1961.4,1799 ; 1960.4,1800 1961.4,1800 ; 1960.4,1801 1961.4,1801 ; 1960.4,1802 1961.4,1802 ; 1960.4,1803 1961.4,1803 ; 1961.4,1669 1986.4,1669 ; 1962.4,1670 1985.4,1670 ; 1962.4,1721 1966.4,1721 ; 1963.4,1692 1969.4,1692 ; 1963.4,1757 1977.4,1757 ; 1964.4,1671 1982.4,1671 ; 1964.4,1756 1977.4,1756 ; 1964.4,1758 1977.4,1758 ; 1964.4,1759 1976.4,1759 ; 1964.4,1760 1976.4,1760 ; 1964.4,1761 1976.4,1761 ; 1964.4,1762 1976.4,1762 ; 1964.4,1763 1976.4,1763 ; 1964.4,1764 1975.4,1764 ; 1964.4,1765 1975.4,1765 ; 1964.4,1766 1975.4,1766 ; 1964.4,1767 1975.4,1767 ; 1965.4,1720 1969.4,1720 ; 1965.4,1755 1977.4,1755 ; 1965.4,1768 1975.4,1768 ; 1965.4,1769 1974.4,1769 ; 1965.4,1770 1974.4,1770 ; 1965.4,1771 1974.4,1771 ; 1965.4,1772 1974.4,1772 ; 1965.4,1795 1974.4,1795 ; 1965.4,1796 1974.4,1796 ; 1965.4,1797 1975.4,1797 ; 1965.4,1798 1974.4,1798 ; 1965.4,1799 1973.4,1799 ; 1965.4,1800 1972.4,1800 ; 1965.4,1801 1971.4,1801 ; 1966.4,1672 1979.4,1672 ; 1966.4,1693 1970.4,1693 ; 1966.4,1754 1977.4,1754 ; 1966.4,1773 1973.4,1773 ; 1966.4,1774 1973.4,1774 ; 1966.4,1775 1973.4,1775 ; 1966.4,1776 1973.4,1776 ; 1966.4,1777 1973.4,1777 ; 1966.4,1778 1973.4,1778 ; 1966.4,1779 1973.4,1779 ; 1966.4,1785 1974.4,1785 ; 1966.4,1786 1974.4,1786 ; 1966.4,1787 1974.4,1787 ; 1966.4,1788 1974.4,1788 ; 1966.4,1789 1974.4,1789 ; 1966.4,1790 1974.4,1790 ; 1966.4,1791 1974.4,1791 ; 1966.4,1792 1974.4,1792 ; 1966.4,1793 1974.4,1793 ; 1966.4,1794 1974.4,1794 ; 1966.4,1802 1970.4,1802 ; 1966.4,1803 1969.4,1803 ; 1967.4,1753 1977.4,1753 ; 1967.4,1780 1973.4,1780 ; 1967.4,1781 1973.4,1781 ; 1967.4,1782 1973.4,1782 ; 1967.4,1783 1974.4,1783 ; 1967.4,1784 1974.4,1784 ; 1967.4,1804 1968.4,1804 ; 1968.4,1752 1977.4,1752 ; 1969.4,1694 1972.4,1694 ; 1969.4,1719 1971.4,1719 ; 1969.4,1751 1977.4,1751 ; 1970.4,1750 1977.4,1750 ; 1971.4,1749 1977.4,1749 ; 1971.4,1808 1973.4,1808 ; 1972.4,1718 1974.4,1718 ; 1972.4,1748 1977.4,1748 ; 1973.4,1747 1977.4,1747 ; 1973.4,1807 1997.4,1807 ; 1974.4,1745 1978.4,1745 ; 1974.4,1746 1978.4,1746 ; 1975.4,1744 1978.4,1744 ; 1975.4,1798 1977.4,1798 ; 1975.4,1801 1976.4,1801 ; 1975.4,1806 1994.4,1806 ; 1975.4,1808 2000.4,1808 ; 1976.4,1742 1979.4,1742 ; 1976.4,1743 1978.4,1743 ; 1976.4,1799 1982.4,1799 ; 1976.4,1800 1978.4,1800 ; 1976.4,1805 1991.4,1805 ; 1977.4,1740 1979.4,1740 ; 1977.4,1741 1979.4,1741 ; 1977.4,1804 1989.4,1804 ; 1977.4,1809 2003.4,1809 ; 1978.4,1738 1979.4,1738 ; 1978.4,1739 1979.4,1739 ; 1978.4,1775 2362.4,1775 ; 1978.4,1776 2362.4,1776 ; 1978.4,1777 2362.4,1777 ; 1978.4,1778 2362.4,1778 ; 1978.4,1779 2362.4,1779 ; 1978.4,1780 2362.4,1780 ; 1978.4,1803 1987.4,1803 ; 1979.4,1737 1980.4,1737 ; 1979.4,1771 2362.4,1771 ; 1979.4,1772 2362.4,1772 ; 1979.4,1773 2362.4,1773 ; 1979.4,1774 2362.4,1774 ; 1979.4,1781 2362.4,1781 ; 1979.4,1782 2362.4,1782 ; 1979.4,1783 2362.4,1783 ; 1979.4,1784 2362.4,1784 ; 1979.4,1802 1985.4,1802 ; 1979.4,1810 2006.4,1810 ; 1980.4,1768 1992.4,1768 ; 1980.4,1769 2001.4,1769 ; 1980.4,1770 2362.4,1770 ; 1980.4,1785 2362.4,1785 ; 1980.4,1786 2362.4,1786 ; 1980.4,1787 2362.4,1787 ; 1980.4,1788 2362.4,1788 ; 1980.4,1789 2362.4,1789 ; 1980.4,1790 2362.4,1790 ; 1980.4,1791 2362.4,1791 ; 1980.4,1792 2362.4,1792 ; 1980.4,1793 2362.4,1793 ; 1980.4,1794 2362.4,1794 ; 1980.4,1795 2362.4,1795 ; 1980.4,1796 1982.4,1796 ; 1980.4,1797 1982.4,1797 ; 1980.4,1798 1982.4,1798 ; 1980.4,1800 1982.4,1800 ; 1980.4,1801 1983.4,1801 ; 1981.4,1764 1984.4,1764 ; 1981.4,1765 1983.4,1765 ; 1981.4,1766 1983.4,1766 ; 1981.4,1767 1983.4,1767 ; 1981.4,1811 2010.4,1811 ; 1982.4,1757 2362.4,1757 ; 1982.4,1758 2050.4,1758 ; 1982.4,1759 2046.4,1759 ; 1982.4,1760 2043.4,1760 ; 1982.4,1761 2040.4,1761 ; 1982.4,1762 1984.4,1762 ; 1982.4,1763 1984.4,1763 ; 1983.4,1749 2362.4,1749 ; 1983.4,1750 2362.4,1750 ; 1983.4,1751 2362.4,1751 ; 1983.4,1752 2362.4,1752 ; 1983.4,1753 2362.4,1753 ; 1983.4,1754 2362.4,1754 ; 1983.4,1755 2362.4,1755 ; 1983.4,1756 2362.4,1756 ; 1983.4,1812 2013.4,1812 ; 1984.4,1742 2055.4,1742 ; 1984.4,1743 2055.4,1743 ; 1984.4,1744 2055.4,1744 ; 1984.4,1745 2362.4,1745 ; 1984.4,1746 2362.4,1746 ; 1984.4,1747 2362.4,1747 ; 1984.4,1748 2362.4,1748 ; 1985.4,1734 2055.4,1734 ; 1985.4,1735 2055.4,1735 ; 1985.4,1736 2055.4,1736 ; 1985.4,1737 2055.4,1737 ; 1985.4,1738 2055.4,1738 ; 1985.4,1739 2055.4,1739 ; 1985.4,1740 2055.4,1740 ; 1985.4,1741 2055.4,1741 ; 1986.4,1729 2001.4,1729 ; 1986.4,1730 2001.4,1730 ; 1986.4,1731 2055.4,1731 ; 1986.4,1732 2055.4,1732 ; 1986.4,1733 2055.4,1733 ; 1986.4,1796 2362.4,1796 ; 1986.4,1813 2017.4,1813 ; 1987.4,1727 2001.4,1727 ; 1987.4,1728 2001.4,1728 ; 1987.4,1762 2036.4,1762 ; 1988.4,1726 2001.4,1726 ; 1988.4,1797 2362.4,1797 ; 1989.4,1725 2001.4,1725 ; 1989.4,1814 2021.4,1814 ; 1991.4,1724 2001.4,1724 ; 1991.4,1798 2362.4,1798 ; 1991.4,1815 2024.4,1815 ; 1993.4,1723 2001.4,1723 ; 1993.4,1799 2362.4,1799 ; 1994.4,1816 2028.4,1816 ; 1996.4,1722 2001.4,1722 ; 1996.4,1800 2362.4,1800 ; 1997.4,1763 2030.4,1763 ; 1997.4,1817 2032.4,1817 ; 1998.4,1801 2362.4,1801 ; 2001.4,1802 2362.4,1802 ; 2001.4,1818 2036.4,1818 ; 2003.4,1730 2055.4,1730 ; 2004.4,1729 2055.4,1729 ; 2004.4,1803 2362.4,1803 ; 2004.4,1819 2040.4,1819 ; 2005.4,1728 2055.4,1728 ; 2006.4,1727 2020.4,1727 ; 2007.4,1726 2019.4,1726 ; 2007.4,1764 2022.4,1764 ; 2007.4,1804 2362.4,1804 ; 2008.4,1644 2011.4,1644 ; 2008.4,1724 2018.4,1724 ; 2008.4,1725 2019.4,1725 ; 2008.4,1820 2045.4,1820 ; 2010.4,1723 2016.4,1723 ; 2010.4,1805 2362.4,1805 ; 2011.4,1722 2012.4,1722 ; 2011.4,1821 2049.4,1821 ; 2013.4,1682 2055.4,1682 ; 2013.4,1683 2055.4,1683 ; 2013.4,1684 2055.4,1684 ; 2013.4,1685 2055.4,1685 ; 2013.4,1686 2055.4,1686 ; 2013.4,1687 2055.4,1687 ; 2013.4,1688 2055.4,1688 ; 2013.4,1689 2055.4,1689 ; 2013.4,1690 2055.4,1690 ; 2013.4,1806 2362.4,1806 ; 2014.4,1680 2055.4,1680 ; 2014.4,1681 2055.4,1681 ; 2014.4,1691 2055.4,1691 ; 2014.4,1692 2035.4,1692 ; 2014.4,1693 2034.4,1693 ; 2015.4,1678 2055.4,1678 ; 2015.4,1679 2055.4,1679 ; 2015.4,1694 2034.4,1694 ; 2015.4,1715 2019.4,1715 ; 2015.4,1716 2017.4,1716 ; 2015.4,1717 2016.4,1717 ; 2015.4,1822 2054.4,1822 ; 2016.4,1676 2055.4,1676 ; 2016.4,1677 2055.4,1677 ; 2016.4,1695 2034.4,1695 ; 2016.4,1696 2034.4,1696 ; 2017.4,1675 2055.4,1675 ; 2017.4,1697 2034.4,1697 ; 2017.4,1769 2362.4,1769 ; 2017.4,1807 2362.4,1807 ; 2018.4,1673 2055.4,1673 ; 2018.4,1674 2055.4,1674 ; 2019.4,1671 2029.4,1671 ; 2019.4,1672 2055.4,1672 ; 2019.4,1698 2034.4,1698 ; 2019.4,1823 2059.4,1823 ; 2020.4,1669 2027.4,1669 ; 2020.4,1670 2028.4,1670 ; 2020.4,1808 2362.4,1808 ; 2021.4,1640 2022.4,1640 ; 2021.4,1668 2027.4,1668 ; 2021.4,1699 2034.4,1699 ; 2022.4,1634 2026.4,1634 ; 2022.4,1635 2025.4,1635 ; 2022.4,1636 2024.4,1636 ; 2022.4,1637 2024.4,1637 ; 2022.4,1638 2023.4,1638 ; 2022.4,1667 2026.4,1667 ; 2023.4,1629 2057.4,1629 ; 2023.4,1630 2057.4,1630 ; 2023.4,1631 2057.4,1631 ; 2023.4,1632 2030.4,1632 ; 2023.4,1633 2028.4,1633 ; 2023.4,1809 2362.4,1809 ; 2023.4,1824 2064.4,1824 ; 2024.4,1666 2026.4,1666 ; 2024.4,1725 2055.4,1725 ; 2024.4,1726 2055.4,1726 ; 2024.4,1727 2055.4,1727 ; 2025.4,1724 2055.4,1724 ; 2026.4,1723 2055.4,1723 ; 2027.4,1768 2362.4,1768 ; 2027.4,1810 2362.4,1810 ; 2028.4,1641 2057.4,1641 ; 2028.4,1642 2057.4,1642 ; 2028.4,1643 2058.4,1643 ; 2028.4,1644 2058.4,1644 ; 2028.4,1645 2059.4,1645 ; 2028.4,1646 2059.4,1646 ; 2028.4,1647 2060.4,1647 ; 2028.4,1648 2061.4,1648 ; 2028.4,1649 2062.4,1649 ; 2028.4,1650 2063.4,1650 ; 2028.4,1825 2070.4,1825 ; 2029.4,1638 2058.4,1638 ; 2029.4,1639 2057.4,1639 ; 2029.4,1640 2057.4,1640 ; 2029.4,1651 2065.4,1651 ; 2029.4,1652 2362.4,1652 ; 2029.4,1700 2031.4,1700 ; 2030.4,1635 2057.4,1635 ; 2030.4,1636 2102.4,1636 ; 2030.4,1637 2059.4,1637 ; 2030.4,1653 2362.4,1653 ; 2031.4,1634 2057.4,1634 ; 2031.4,1670 2055.4,1670 ; 2031.4,1671 2055.4,1671 ; 2031.4,1811 2362.4,1811 ; 2032.4,1632 2057.4,1632 ; 2032.4,1633 2057.4,1633 ; 2032.4,1654 2362.4,1654 ; 2032.4,1722 2055.4,1722 ; 2032.4,1767 2362.4,1767 ; 2032.4,1826 2075.4,1826 ; 2033.4,1655 2362.4,1655 ; 2033.4,1658 2362.4,1658 ; 2033.4,1659 2362.4,1659 ; 2033.4,1669 2055.4,1669 ; 2034.4,1660 2362.4,1660 ; 2034.4,1661 2362.4,1661 ; 2034.4,1662 2362.4,1662 ; 2034.4,1663 2055.4,1663 ; 2034.4,1664 2055.4,1664 ; 2034.4,1665 2055.4,1665 ; 2034.4,1666 2055.4,1666 ; 2034.4,1667 2055.4,1667 ; 2034.4,1668 2055.4,1668 ; 2034.4,1812 2362.4,1812 ; 2035.4,1656 2362.4,1656 ; 2035.4,1657 2362.4,1657 ; 2036.4,1766 2362.4,1766 ; 2037.4,1692 2055.4,1692 ; 2037.4,1693 2042.4,1693 ; 2037.4,1694 2042.4,1694 ; 2037.4,1695 2042.4,1695 ; 2037.4,1696 2042.4,1696 ; 2037.4,1827 2081.4,1827 ; 2038.4,1697 2041.4,1697 ; 2038.4,1698 2041.4,1698 ; 2038.4,1813 2362.4,1813 ; 2039.4,1699 2041.4,1699 ; 2040.4,1765 2362.4,1765 ; 2042.4,1764 2362.4,1764 ; 2042.4,1814 2362.4,1814 ; 2042.4,1828 2087.4,1828 ; 2044.4,1693 2055.4,1693 ; 2044.4,1694 2055.4,1694 ; 2044.4,1721 2055.4,1721 ; 2045.4,1695 2055.4,1695 ; 2045.4,1696 2055.4,1696 ; 2045.4,1697 2055.4,1697 ; 2045.4,1698 2055.4,1698 ; 2045.4,1763 2362.4,1763 ; 2046.4,1699 2055.4,1699 ; 2046.4,1700 2055.4,1700 ; 2046.4,1701 2055.4,1701 ; 2046.4,1720 2055.4,1720 ; 2047.4,1702 2055.4,1702 ; 2047.4,1703 2055.4,1703 ; 2047.4,1704 2055.4,1704 ; 2047.4,1719 2055.4,1719 ; 2047.4,1762 2362.4,1762 ; 2047.4,1815 2362.4,1815 ; 2047.4,1829 2094.4,1829 ; 2048.4,1705 2055.4,1705 ; 2048.4,1706 2055.4,1706 ; 2048.4,1707 2055.4,1707 ; 2048.4,1718 2055.4,1718 ; 2049.4,1708 2055.4,1708 ; 2049.4,1709 2055.4,1709 ; 2049.4,1710 2055.4,1710 ; 2049.4,1711 2055.4,1711 ; 2049.4,1712 2055.4,1712 ; 2049.4,1713 2055.4,1713 ; 2049.4,1714 2055.4,1714 ; 2049.4,1715 2055.4,1715 ; 2049.4,1716 2055.4,1716 ; 2049.4,1717 2055.4,1717 ; 2049.4,1761 2362.4,1761 ; 2051.4,1760 2362.4,1760 ; 2051.4,1816 2362.4,1816 ; 2052.4,1758 2362.4,1758 ; 2052.4,1759 2362.4,1759 ; 2052.4,1830 2100.4,1830 ; 2056.4,1817 2362.4,1817 ; 2058.4,1831 2108.4,1831 ; 2061.4,1818 2362.4,1818 ; 2064.4,1637 2102.4,1637 ; 2064.4,1832 2117.4,1832 ; 2065.4,1622 2102.4,1622 ; 2065.4,1623 2102.4,1623 ; 2065.4,1624 2102.4,1624 ; 2065.4,1625 2102.4,1625 ; 2065.4,1626 2102.4,1626 ; 2065.4,1627 2102.4,1627 ; 2065.4,1638 2102.4,1638 ; 2065.4,1639 2102.4,1639 ; 2065.4,1640 2102.4,1640 ; 2065.4,1641 2101.4,1641 ; 2066.4,1620 2102.4,1620 ; 2066.4,1621 2102.4,1621 ; 2066.4,1642 2101.4,1642 ; 2066.4,1643 2100.4,1643 ; 2067.4,1619 2102.4,1619 ; 2067.4,1644 2099.4,1644 ; 2067.4,1819 2362.4,1819 ; 2070.4,1833 2128.4,1833 ; 2072.4,1618 2102.4,1618 ; 2072.4,1820 2362.4,1820 ; 2076.4,1834 2362.4,1834 ; 2077.4,1821 2362.4,1821 ; 2078.4,1663 2115.4,1663 ; 2078.4,1664 2115.4,1664 ; 2078.4,1665 2115.4,1665 ; 2078.4,1666 2115.4,1666 ; 2078.4,1667 2115.4,1667 ; 2078.4,1668 2115.4,1668 ; 2078.4,1669 2115.4,1669 ; 2078.4,1670 2115.4,1670 ; 2078.4,1671 2115.4,1671 ; 2078.4,1672 2115.4,1672 ; 2078.4,1673 2115.4,1673 ; 2078.4,1674 2115.4,1674 ; 2078.4,1675 2115.4,1675 ; 2078.4,1676 2115.4,1676 ; 2078.4,1677 2115.4,1677 ; 2078.4,1678 2115.4,1678 ; 2078.4,1679 2115.4,1679 ; 2078.4,1680 2115.4,1680 ; 2078.4,1681 2115.4,1681 ; 2078.4,1682 2115.4,1682 ; 2078.4,1683 2115.4,1683 ; 2078.4,1684 2115.4,1684 ; 2078.4,1685 2115.4,1685 ; 2078.4,1686 2115.4,1686 ; 2078.4,1687 2115.4,1687 ; 2078.4,1688 2115.4,1688 ; 2078.4,1689 2115.4,1689 ; 2078.4,1690 2115.4,1690 ; 2078.4,1691 2115.4,1691 ; 2078.4,1692 2115.4,1692 ; 2078.4,1714 2115.4,1714 ; 2078.4,1715 2115.4,1715 ; 2078.4,1716 2115.4,1716 ; 2078.4,1717 2115.4,1717 ; 2078.4,1718 2115.4,1718 ; 2078.4,1719 2115.4,1719 ; 2078.4,1720 2115.4,1720 ; 2078.4,1721 2115.4,1721 ; 2078.4,1722 2115.4,1722 ; 2078.4,1723 2115.4,1723 ; 2078.4,1724 2115.4,1724 ; 2078.4,1725 2115.4,1725 ; 2078.4,1726 2115.4,1726 ; 2078.4,1727 2115.4,1727 ; 2078.4,1728 2115.4,1728 ; 2078.4,1729 2115.4,1729 ; 2078.4,1730 2115.4,1730 ; 2078.4,1731 2115.4,1731 ; 2078.4,1732 2115.4,1732 ; 2078.4,1733 2115.4,1733 ; 2078.4,1734 2115.4,1734 ; 2078.4,1735 2115.4,1735 ; 2078.4,1736 2115.4,1736 ; 2078.4,1737 2115.4,1737 ; 2078.4,1738 2115.4,1738 ; 2078.4,1739 2115.4,1739 ; 2078.4,1740 2115.4,1740 ; 2078.4,1741 2115.4,1741 ; 2078.4,1742 2115.4,1742 ; 2078.4,1743 2115.4,1743 ; 2078.4,1744 2117.4,1744 ; 2082.4,1822 2362.4,1822 ; 2082.4,1835 2362.4,1835 ; 2087.4,1635 2102.4,1635 ; 2088.4,1628 2102.4,1628 ; 2088.4,1823 2362.4,1823 ; 2089.4,1634 2102.4,1634 ; 2089.4,1836 2362.4,1836 ; 2090.4,1629 2102.4,1629 ; 2090.4,1630 2102.4,1630 ; 2090.4,1631 2102.4,1631 ; 2090.4,1632 2102.4,1632 ; 2090.4,1633 2102.4,1633 ; 2093.4,1824 2362.4,1824 ; 2097.4,1611 2102.4,1611 ; 2097.4,1837 2362.4,1837 ; 2098.4,1825 2362.4,1825 ; 2099.4,1612 2102.4,1612 ; 2099.4,1616 2102.4,1616 ; 2099.4,1617 2102.4,1617 ; 2100.4,1613 2102.4,1613 ; 2100.4,1614 2102.4,1614 ; 2100.4,1615 2102.4,1615 ; 2101.4,1651 2144.4,1651 ; 2103.4,1650 2143.4,1650 ; 2104.4,1826 2362.4,1826 ; 2105.4,1649 2141.4,1649 ; 2105.4,1838 2362.4,1838 ; 2106.4,1648 2140.4,1648 ; 2107.4,1646 2138.4,1646 ; 2107.4,1647 2139.4,1647 ; 2108.4,1645 2137.4,1645 ; 2109.4,1618 2114.4,1618 ; 2109.4,1619 2117.4,1619 ; 2109.4,1639 2133.4,1639 ; 2109.4,1640 2133.4,1640 ; 2109.4,1641 2134.4,1641 ; 2109.4,1642 2135.4,1642 ; 2109.4,1643 2136.4,1643 ; 2109.4,1644 2136.4,1644 ; 2109.4,1827 2362.4,1827 ; 2110.4,1620 2119.4,1620 ; 2110.4,1621 2120.4,1621 ; 2110.4,1622 2121.4,1622 ; 2110.4,1623 2122.4,1623 ; 2110.4,1624 2123.4,1624 ; 2110.4,1625 2123.4,1625 ; 2110.4,1626 2124.4,1626 ; 2110.4,1627 2125.4,1627 ; 2110.4,1628 2125.4,1628 ; 2110.4,1629 2126.4,1629 ; 2110.4,1630 2127.4,1630 ; 2110.4,1631 2127.4,1631 ; 2110.4,1632 2128.4,1632 ; 2110.4,1633 2129.4,1633 ; 2110.4,1634 2129.4,1634 ; 2110.4,1635 2130.4,1635 ; 2110.4,1636 2131.4,1636 ; 2110.4,1637 2131.4,1637 ; 2110.4,1638 2132.4,1638 ; 2114.4,1839 2226.4,1839 ; 2115.4,1828 2362.4,1828 ; 2117.4,1611 2158.4,1611 ; 2120.4,1612 2156.4,1612 ; 2121.4,1829 2362.4,1829 ; 2122.4,1613 2155.4,1613 ; 2123.4,1614 2155.4,1614 ; 2124.4,1615 2155.4,1615 ; 2125.4,1616 2155.4,1616 ; 2125.4,1840 2208.4,1840 ; 2126.4,1617 2155.4,1617 ; 2127.4,1618 2155.4,1618 ; 2127.4,1830 2362.4,1830 ; 2128.4,1619 2155.4,1619 ; 2129.4,1620 2155.4,1620 ; 2130.4,1621 2155.4,1621 ; 2130.4,1622 2155.4,1622 ; 2131.4,1623 2155.4,1623 ; 2132.4,1624 2155.4,1624 ; 2133.4,1625 2155.4,1625 ; 2133.4,1626 2155.4,1626 ; 2134.4,1627 2155.4,1627 ; 2135.4,1628 2155.4,1628 ; 2135.4,1629 2155.4,1629 ; 2135.4,1831 2362.4,1831 ; 2136.4,1630 2155.4,1630 ; 2137.4,1631 2155.4,1631 ; 2137.4,1632 2155.4,1632 ; 2138.4,1633 2155.4,1633 ; 2138.4,1634 2155.4,1634 ; 2138.4,1663 2166.4,1663 ; 2138.4,1664 2162.4,1664 ; 2138.4,1665 2160.4,1665 ; 2138.4,1666 2158.4,1666 ; 2138.4,1667 2156.4,1667 ; 2138.4,1668 2155.4,1668 ; 2138.4,1669 2153.4,1669 ; 2138.4,1670 2152.4,1670 ; 2138.4,1671 2151.4,1671 ; 2138.4,1672 2150.4,1672 ; 2138.4,1673 2149.4,1673 ; 2138.4,1674 2148.4,1674 ; 2138.4,1675 2147.4,1675 ; 2138.4,1676 2147.4,1676 ; 2138.4,1677 2146.4,1677 ; 2138.4,1678 2145.4,1678 ; 2138.4,1679 2145.4,1679 ; 2138.4,1680 2144.4,1680 ; 2138.4,1681 2144.4,1681 ; 2138.4,1682 2144.4,1682 ; 2138.4,1683 2143.4,1683 ; 2138.4,1684 2143.4,1684 ; 2138.4,1685 2143.4,1685 ; 2138.4,1686 2143.4,1686 ; 2138.4,1687 2143.4,1687 ; 2138.4,1688 2143.4,1688 ; 2138.4,1689 2142.4,1689 ; 2138.4,1690 2142.4,1690 ; 2138.4,1691 2142.4,1691 ; 2138.4,1692 2142.4,1692 ; 2138.4,1714 2206.4,1714 ; 2138.4,1715 2206.4,1715 ; 2138.4,1716 2206.4,1716 ; 2138.4,1717 2142.4,1717 ; 2138.4,1718 2142.4,1718 ; 2138.4,1719 2142.4,1719 ; 2138.4,1720 2142.4,1720 ; 2138.4,1721 2142.4,1721 ; 2138.4,1722 2143.4,1722 ; 2138.4,1723 2143.4,1723 ; 2138.4,1724 2143.4,1724 ; 2138.4,1725 2144.4,1725 ; 2138.4,1726 2144.4,1726 ; 2138.4,1727 2145.4,1727 ; 2138.4,1728 2145.4,1728 ; 2138.4,1729 2146.4,1729 ; 2138.4,1730 2146.4,1730 ; 2138.4,1731 2147.4,1731 ; 2138.4,1732 2148.4,1732 ; 2138.4,1733 2149.4,1733 ; 2138.4,1734 2150.4,1734 ; 2138.4,1735 2151.4,1735 ; 2138.4,1736 2152.4,1736 ; 2138.4,1737 2153.4,1737 ; 2138.4,1738 2155.4,1738 ; 2138.4,1739 2157.4,1739 ; 2138.4,1740 2158.4,1740 ; 2138.4,1741 2161.4,1741 ; 2138.4,1742 2163.4,1742 ; 2138.4,1743 2167.4,1743 ; 2138.4,1744 2174.4,1744 ; 2138.4,1841 2187.4,1841 ; 2139.4,1635 2155.4,1635 ; 2140.4,1636 2155.4,1636 ; 2141.4,1637 2155.4,1637 ; 2141.4,1638 2155.4,1638 ; 2142.4,1639 2155.4,1639 ; 2143.4,1640 2155.4,1640 ; 2144.4,1641 2155.4,1641 ; 2144.4,1832 2362.4,1832 ; 2144.4,1833 2362.4,1833 ; 2145.4,1642 2155.4,1642 ; 2146.4,1643 2155.4,1643 ; 2147.4,1644 2155.4,1644 ; 2160.4,1611 2170.4,1611 ; 2160.4,1846 2362.4,1846 ; 2162.4,1612 2168.4,1612 ; 2163.4,1613 2167.4,1613 ; 2163.4,1614 2167.4,1614 ; 2163.4,1615 2167.4,1615 ; 2163.4,1616 2167.4,1616 ; 2163.4,1617 2167.4,1617 ; 2163.4,1618 2167.4,1618 ; 2163.4,1619 2167.4,1619 ; 2163.4,1620 2167.4,1620 ; 2163.4,1621 2167.4,1621 ; 2163.4,1622 2167.4,1622 ; 2163.4,1623 2167.4,1623 ; 2163.4,1624 2167.4,1624 ; 2163.4,1625 2167.4,1625 ; 2163.4,1626 2167.4,1626 ; 2163.4,1627 2167.4,1627 ; 2163.4,1628 2167.4,1628 ; 2163.4,1629 2167.4,1629 ; 2163.4,1630 2167.4,1630 ; 2163.4,1631 2167.4,1631 ; 2163.4,1632 2167.4,1632 ; 2163.4,1633 2167.4,1633 ; 2163.4,1634 2167.4,1634 ; 2163.4,1635 2167.4,1635 ; 2163.4,1636 2167.4,1636 ; 2163.4,1637 2167.4,1637 ; 2163.4,1638 2167.4,1638 ; 2163.4,1639 2167.4,1639 ; 2163.4,1640 2167.4,1640 ; 2163.4,1641 2167.4,1641 ; 2163.4,1642 2167.4,1642 ; 2163.4,1643 2167.4,1643 ; 2163.4,1644 2167.4,1644 ; 2163.4,1645 2167.4,1645 ; 2163.4,1646 2167.4,1646 ; 2163.4,1647 2167.4,1647 ; 2163.4,1648 2167.4,1648 ; 2163.4,1649 2167.4,1649 ; 2163.4,1650 2167.4,1650 ; 2163.4,1651 2168.4,1651 ; 2165.4,1690 2206.4,1690 ; 2165.4,1691 2206.4,1691 ; 2165.4,1692 2206.4,1692 ; 2165.4,1717 2206.4,1717 ; 2166.4,1687 2206.4,1687 ; 2166.4,1688 2206.4,1688 ; 2166.4,1689 2206.4,1689 ; 2166.4,1718 2206.4,1718 ; 2166.4,1719 2205.4,1719 ; 2167.4,1686 2233.4,1686 ; 2167.4,1720 2204.4,1720 ; 2168.4,1685 2233.4,1685 ; 2168.4,1721 2203.4,1721 ; 2170.4,1684 2233.4,1684 ; 2170.4,1722 2202.4,1722 ; 2172.4,1611 2182.4,1611 ; 2174.4,1612 2180.4,1612 ; 2174.4,1651 2181.4,1651 ; 2175.4,1613 2179.4,1613 ; 2175.4,1614 2179.4,1614 ; 2175.4,1615 2179.4,1615 ; 2175.4,1616 2179.4,1616 ; 2175.4,1617 2180.4,1617 ; 2175.4,1618 2208.4,1618 ; 2175.4,1619 2213.4,1619 ; 2175.4,1620 2214.4,1620 ; 2175.4,1621 2215.4,1621 ; 2175.4,1622 2215.4,1622 ; 2175.4,1623 2215.4,1623 ; 2175.4,1624 2215.4,1624 ; 2175.4,1625 2215.4,1625 ; 2175.4,1626 2215.4,1626 ; 2175.4,1627 2215.4,1627